# Altium PCB Snowflake.PcbDoc
Units mil, origin at the board's own origin, x right, y up, seen from the top; angles counter-clockwise.
Board outline 2689.25 x 3099.03 mil, 2 copper layers (Top Layer, Bottom Layer), stack 49.606 mil thick; 60 components, 60 nets, 217 pads, 81 vias.
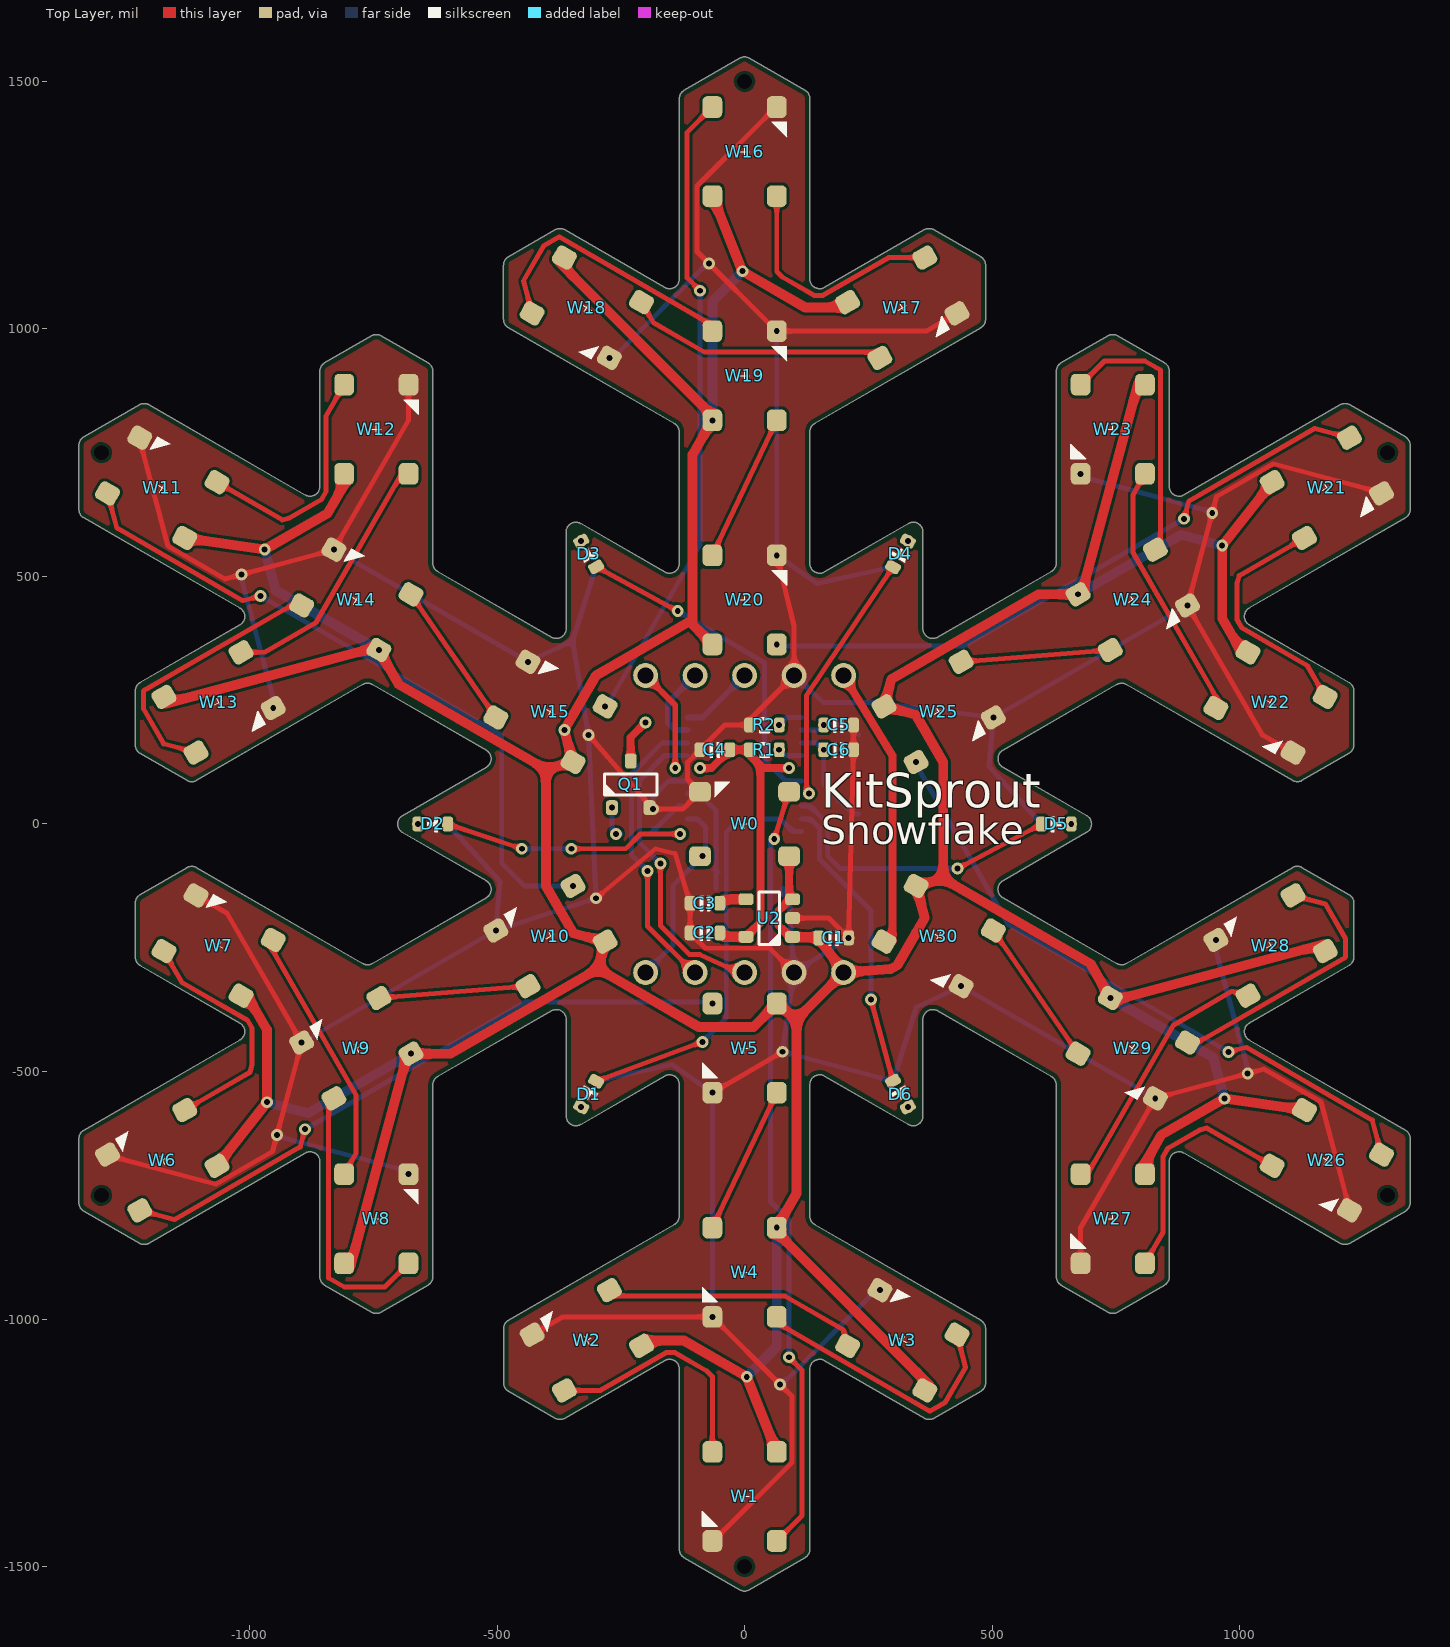
[diagram p0: Top Layer view]
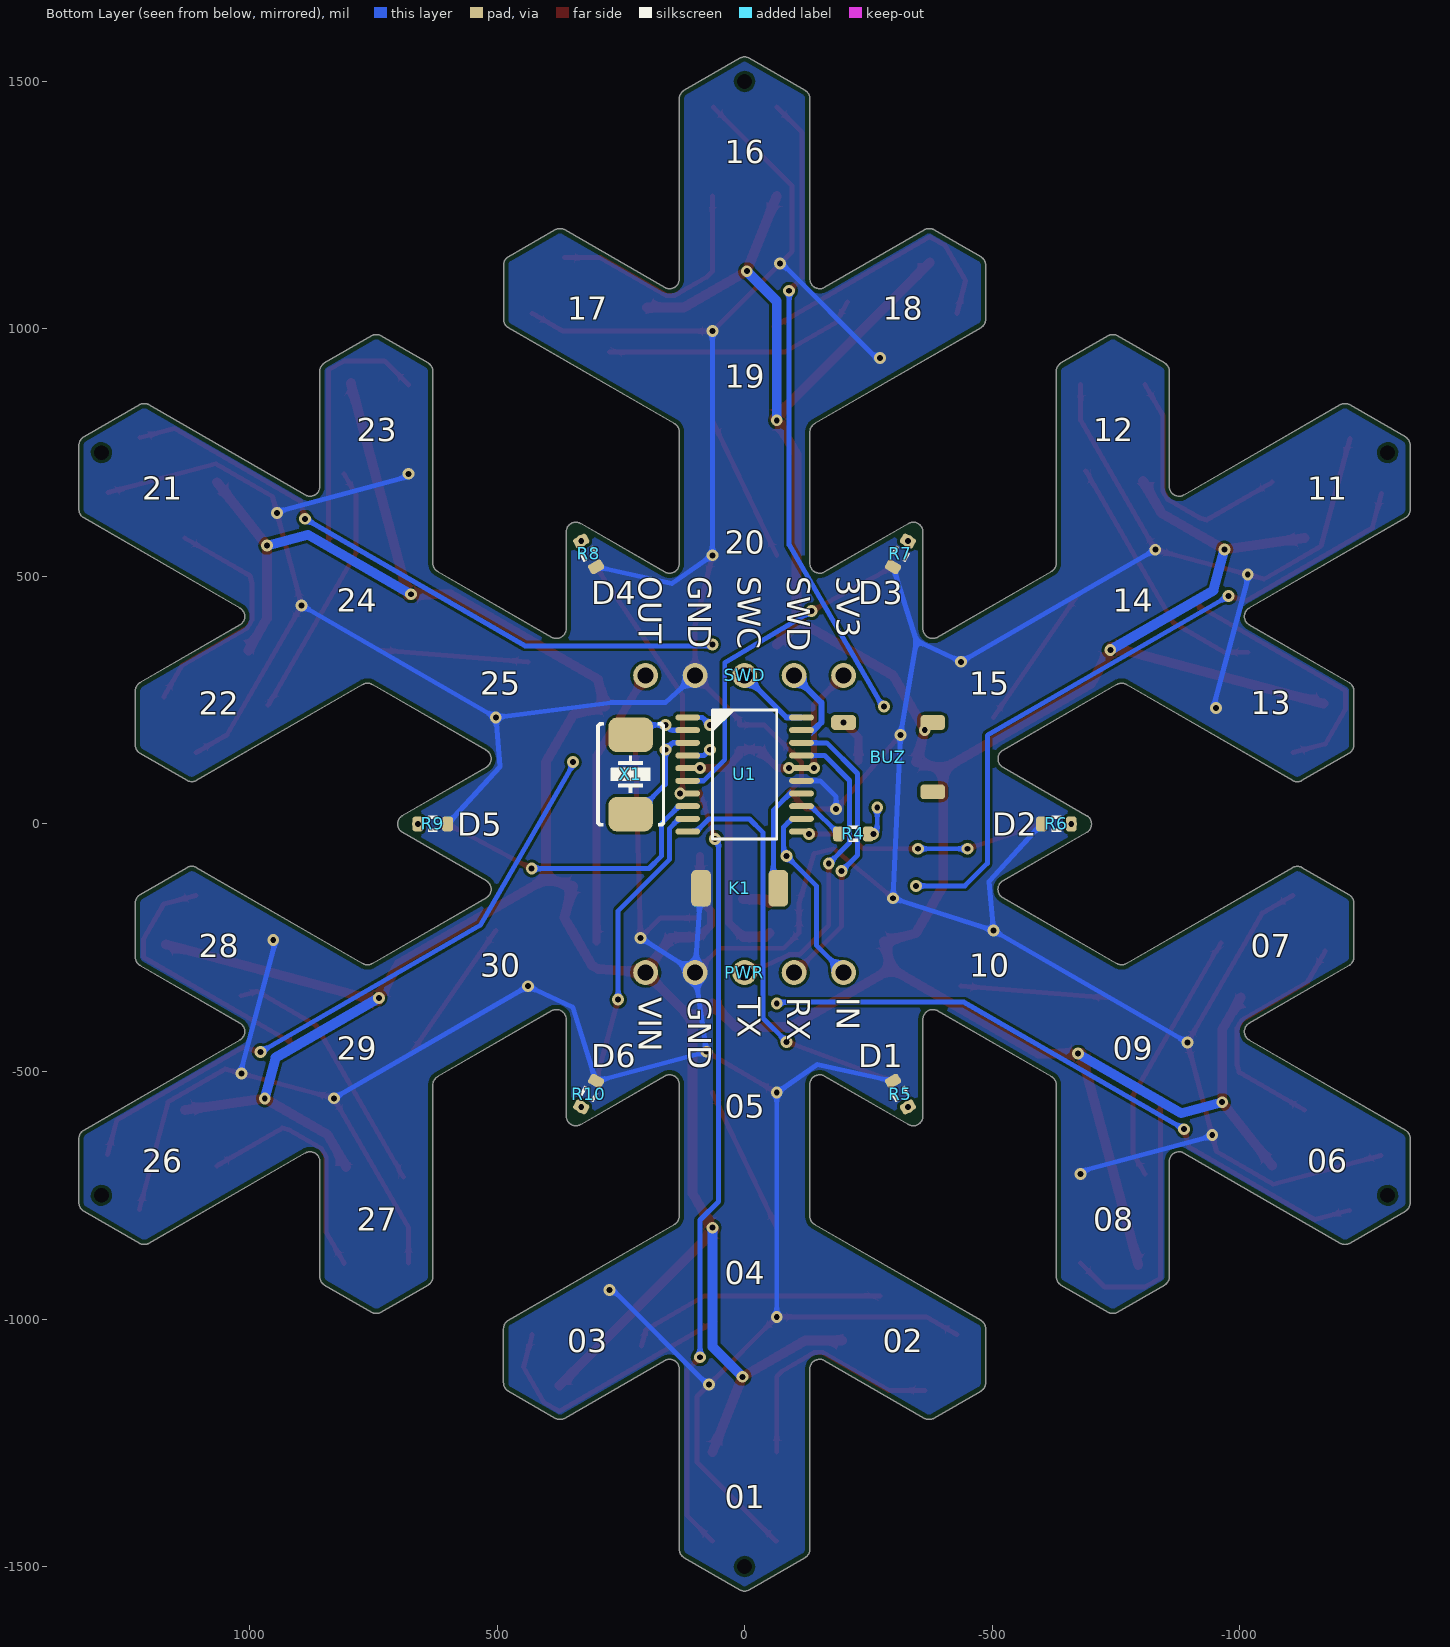
[diagram p1: Bottom Layer view, seen from below]
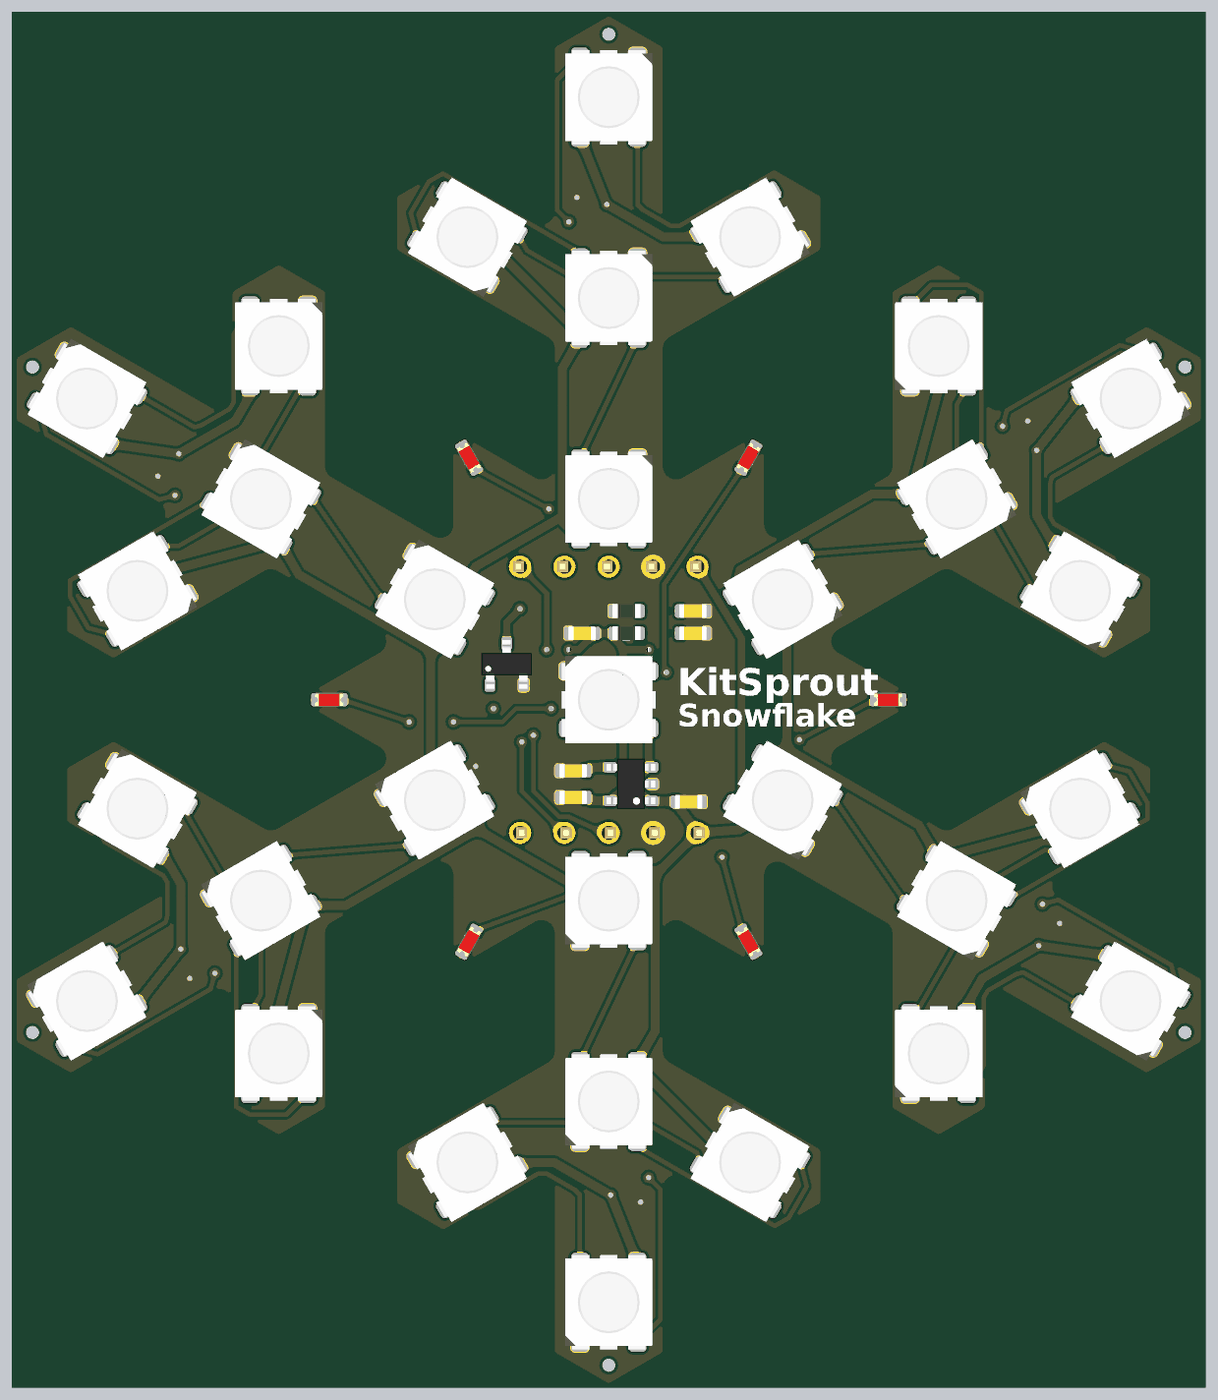
[diagram p2: 3D render of the assembled board from above, using the file's embedded part models]
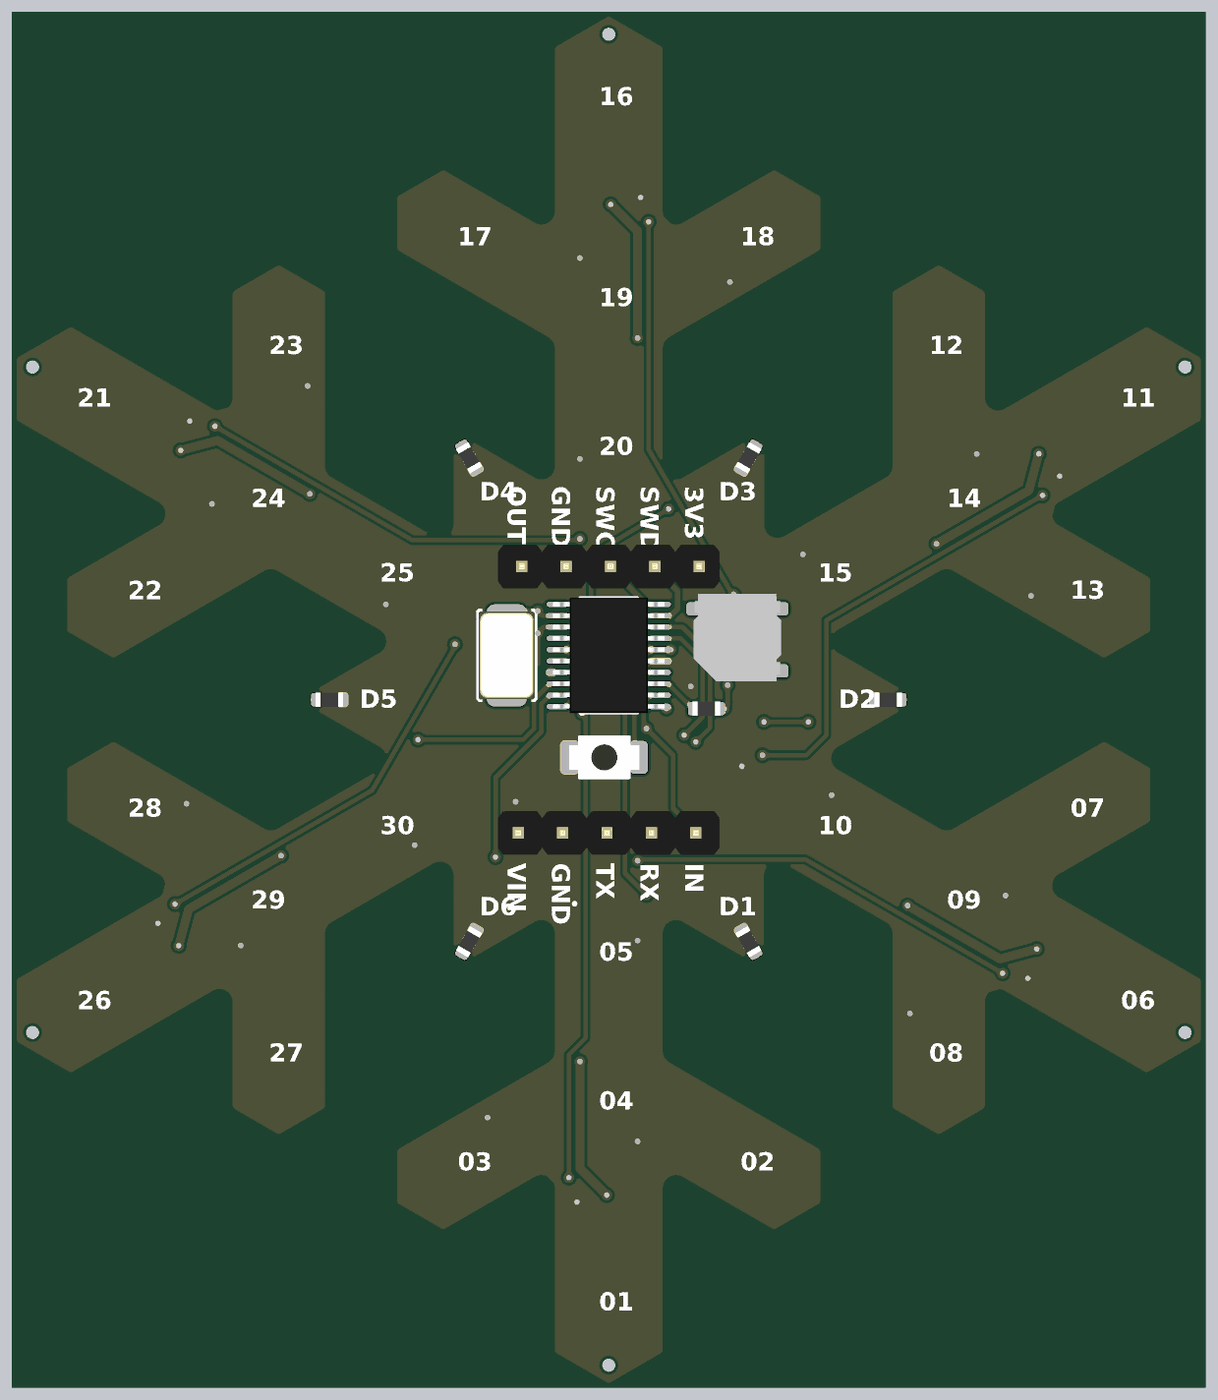
[diagram p3: 3D render of the assembled board from below, using the file's embedded part models]

## Layer stack, top to bottom
Top Solder: solder mask 0.3937, Solder Resist, Dk 3.5
Top Layer: signal copper 1.1811
Dielectric 1: dielectric 47.2441, FR-4, Dk 4.8
Bottom Layer: signal copper 1.1811
Bottom Solder: solder mask 0.3937, Solder Resist, Dk 3.5

## Board outline
341 vertices, not listed, extent -1344.62,-1549.52 1344.63,1549.52

## Design rules (kind name [scope] priority, off if disabled: settings)
BoardOutlineClearance [All] p1: gap=10 ignorepadtopadclearanceinfootprint=FALSE except(0: Arc-SplitContinuation Track-SplitContinuation SMDPad-SplitContinuation THPad-SplitContinuation Via-SplitContinuation Fill-SplitContinuation Poly-SplitContinuation Region-SplitContinuation Text-SplitContinuation)
Clearance ClearancePolygon [InPolygon] p1: gap=6 ignorepadtopadclearanceinfootprint=FALSE except(0: Arc-Hole Track-Hole SMDPad-Hole THPad-Hole Via-Hole Fill-Hole Poly-Hole Region-Hole Text-Hole)
Clearance [All] p2: gap=6 ignorepadtopadclearanceinfootprint=FALSE except(0: Arc-Hole Track-Hole SMDPad-Hole THPad-Hole Via-Hole Fill-Hole Poly-Hole Region-Hole Text-Hole)
ComponentClearance [All] p1: gap=0 collisioncheckmode=3 verticalgap=0 showdistances=FALSE
Height [All] p1: minheight=0 maxheight=5000 prefheight=500
HoleSize [All] p1: absolutevalues=TRUE maxlimit=200 minlimit=1 maxpercent=80.000 minpercent=20.000
HoleToHoleClearance [All] p1: gap=6 allowstackedmicrovias=TRUE
MinimumAnnularRing [All] p1: minimumring=5
MinimumSolderMaskSliver [All] p1: minsoldermaskwidth=0
PolygonConnect [All] p1: connectstyle=Direct reliefconductorwidth=10 reliefentries=4 polygonreliefangle="90 Angle" airgapwidth=10
RoutingVias [All] p1: holewidth=12 width=24 viastyle="Through Hole" minholewidth=12 minwidth=20 maxholewidth=28 maxwidth=50
SilkToSilkClearance [All] p1: silktosilkclearance=0
SilkToSolderMaskClearance [IsPad] p1: minsilkscreentomaskgap=0 clearancetoexposedcopper=TRUE
SolderMaskExpansion [All] p1: expansion=2
Width [All] p1: maxlimit=100 minlimit=6 preferedwidth=10
23 further rules are at their usual default settings.

## Components (designator, comment, footprint, x,y, rotation, side; value= is the part's Value field where it differs from the comment)
BUZ "Buzzer" Buzzer_5x5 -290,140 r90 bottom
C1 "0.1uF" CAP_0603 180,-230 r180 top
C2 "0.1uF" CAP_0603 -80,-220 r0 top
C3 "0.1uF" CAP_0603 -80,-160 r0 top
C4 "0.1uF" CAP_0603 -60,150 r0 top
C5 "0.1uF" CAP_0603 190,200 r180 top
C6 "0.1uF" CAP_0603 190,150 r180 top
D1 "RED" LED_0603_RED -314.96,-545.53 r240 top
D2 "RED" LED_0603_RED -629.92,0 r180 top
D3 "RED" LED_0603_RED -314.96,545.53 r120 top
D4 "RED" LED_0603_RED 314.96,545.53 r60 top
D5 "RED" LED_0603_RED 629.92,0 r0 top
D6 "RED" LED_0603_RED 314.96,-545.53 r300 top
K1 "ButtonTACT" ButtonTACT_3x4x2_180 10,-130 r180 bottom
PWR "HDR1x5_2.54" HDR1X5_2.54_180 200,-300 r90 bottom
Q1 "NPN" SOT23-3 -230,80 r90 top
R1 "10K" RES_0603 40,150 r180 top
R2 "10K" RES_0603 40,200 r0 top
R4 "1K" RES_0603 -220,-20 r180 bottom
R5 "1K" RES_0603 -314.96,-545.53 r240 bottom
R6 "1K" RES_0603 -629.92,0 r180 bottom
R7 "1K" RES_0603 -314.96,545.53 r120 bottom
R8 "1K" RES_0603 314.96,545.53 r60 bottom
R9 "1K" RES_0603 629.92,0 r0 bottom
R10 "1K" RES_0603 314.96,-545.53 r300 bottom
SWD "HDR1x5_2.54" HDR1X5_2.54_180 -200,300 r270 bottom
U1 "STM32F03xF" TSSOP_E170_P0.65_20 0,100 r180 bottom
U2 "RT9193" SOT23-5 50,-190 r180 top
W0 "RGB" LED_5050_WS2812B 0,0 r180 top locked
W1 "RGB" LED_5050_WS2812B 0,-1358.27 r270 top
W2 "RGB" LED_5050_WS2812B -318.64,-1042.87 r210 top
W3 "RGB" LED_5050_WS2812B 318.66,-1042.92 r150 top
W4 "RGB" LED_5050_WS2812B 0,-905.51 r270 top
W5 "RGB" LED_5050_WS2812B 0,-452.76 r270 top locked
W6 "RGB" LED_5050_WS2812B -1176.29,-679.13 r210 top
W7 "RGB" LED_5050_WS2812B -1062.47,-245.49 r150 top
W8 "RGB" LED_5050_WS2812B -743.86,-797.42 r90 top
W9 "RGB" LED_5050_WS2812B -784.2,-452.76 r210 top
W10 "RGB" LED_5050_WS2812B -392.1,-226.38 r210 top
W11 "RGB" LED_5050_WS2812B -1176.29,679.13 r150 top
W12 "RGB" LED_5050_WS2812B -743.83,797.38 r90 top
W13 "RGB" LED_5050_WS2812B -1062.52,245.49 r30 top
W14 "RGB" LED_5050_WS2812B -784.2,452.76 r150 top
W15 "RGB" LED_5050_WS2812B -392.1,226.38 r150 top
W16 "RGB" LED_5050_WS2812B 0,1358.27 r90 top
W17 "RGB" LED_5050_WS2812B 318.64,1042.87 r30 top
W18 "RGB" LED_5050_WS2812B -318.66,1042.92 r330 top
W19 "RGB" LED_5050_WS2812B 0,905.51 r90 top
W20 "RGB" LED_5050_WS2812B 0,452.76 r90 top
W21 "RGB" LED_5050_WS2812B 1176.29,679.13 r30 top
W22 "RGB" LED_5050_WS2812B 1062.47,245.49 r330 top
W23 "RGB" LED_5050_WS2812B 743.86,797.42 r270 top
W24 "RGB" LED_5050_WS2812B 784.2,452.76 r30 top
W25 "RGB" LED_5050_WS2812B 392.1,226.38 r30 top
W26 "RGB" LED_5050_WS2812B 1176.29,-679.13 r330 top
W27 "RGB" LED_5050_WS2812B 743.83,-797.38 r270 top
W28 "RGB" LED_5050_WS2812B 1062.52,-245.49 r210 top
W29 "RGB" LED_5050_WS2812B 784.2,-452.76 r330 top
W30 "RGB" LED_5050_WS2812B 392.1,-226.38 r330 top
X1 "8MHz" XT_5032_2 230,100 r90 bottom

## Footprints (in the part's own frame and the unit in brackets; to place one, negate y for a bottom-side part, rotate by r counter-clockwise, add the part's x,y. Pads: shape width x height; smd on the part's side, far side on the other; paste and mask are expansions set on the pad)
ButtonTACT_3x4x2_180 [mil]
  rrect50% 40x74 smd: 1(-78,0) 2(78,0)
  body extent -79,-49 79,49, height 63
Buzzer_5x5 [mil]
  rrect50% 30x50 smd: N(65,90) NC(-75,-90) P(65,-90)
  body extent -98,-98 98,98, height 106
CAP_0603 [mil]
  rrect50% 22x30 smd: 1(-30,0) 2(30,0)
  silkscreen extent -10,-15 10,15, body extent -31,-16 32,16, height 31
HDR1X5_2.54_180 [mil]
  round 50 hole 32: 1(0,0) 2(0,-100) 3(0,-200) 4(0,-300) 5(0,-400)
  body extent -49,-450 49,50, height 323
LED_0603_RED [mil]
  rrect50% 22x30 smd: 1(-30,0) 2(30,0)
  silkscreen extent -10,-16 10,16, body extent -32,-16 32,16, height 24
LED_5050_WS2812B [mil]
  rrect50% 44x40 smd: 1(-90,65) 2(-90,-65) 3(90,-65) 4(90,65)
  silkscreen extent 30,-85 60,-55, body extent -106,-98 106,98, height 69
RES_0603 [mil]
  rrect50% 22x30 smd: 1(-30,0) 2(30,0)
  silkscreen extent -10,-15 10,16, body extent -31,-16 31,16, height 18
SOT23-3 [mil]
  rrect50% 30x24 smd: 1(-47,38) 2(-47,-38) 3(47,0)
  silkscreen extent -21,-53 21,53, body extent -55,-57 55,57, height 51
SOT23-5 [mil]
  rrect50% 30x24 smd: 1(-47,38) 2(-47,0) 3(-47,-38) 4(47,-38) 5(47,38)
  silkscreen extent -21,-53 21,53, body extent -55,-57 55,57, height 57
TSSOP_E170_P0.65_20 [mil]
  oval 50x12 smd: 1(-115,115.16) 2(-115,89.57) 3(-115,63.98) 4(-115,38.39) 5(-115,12.8) 6(-115,-12.8) 7(-115,-38.39) 8(-115,-63.98) 9(-115,-89.57) 10(-115,-115.16) 11(115,-115.16) 12(115,-89.57) 13(115,-63.98) 14(115,-38.39) 15(115,-12.8) 16(115,12.8) 17(115,38.39) 18(115,63.98) 19(115,89.57) 20(115,115.16)
  silkscreen extent -65,-130 65,130, body extent -126,-130 126,130, height 42
XT_5032_2 [mil]
  rrect50% 70x90 smd: 1(-80,0) 2(80,0)
  silkscreen extent -105,-68 105,68, body extent -98,-63 98,63, height 39

## Part data
C1 C2 C3 C4 C5 C6: library part Cap_0603, "Capacitor", Type=0603
D1 D2 D3 D4 D5 D6: library part LED_0603, "LED", Type=0603
K1: library part ButtonTACT_3x4x2_180, "Button"
PWR SWD: "Header"
Q1: library part BJT_NPN, "Transistor", Type=2N2222
R1 R2 R4 R5 R6 R7 R8 R9 R10: library part Res_0603, "Resistor", Type=0603
U1: "MCU"
U2: "Power", Type=SOT23-5
W0 W1 W2 W3 W4 W5 W6 W7 W8 W9 W10 W11 W12 W13 W14 W15 W16 W17 W18 W19 W20 W21 W22 W23 W24 W25 W26 W27 W28 W29 W30: library part LED_5050_WS2812B, "LED", Type=5050
X1: library part XTAL_5032_2P, "Crystal Oscillator", Type=XTAL5032

## Free pads (board coordinates)
  round 20 hole 30 unplated: 0(-1299.04,-750) 0(-1299.04,750) 0(0,-1500) 0(0,1500) 0(1299.04,-750) 0(1299.04,750)

## Via types
v1: diameter 24, hole 12, Top Layer to Bottom Layer, tented both sides, 81 vias

## Nets (pads, with @x,y where several pads share a name; then routed paths per layer and width w, separated by ;. In a path a pad name is that pad's centre, name@x,y a point inside that pad or via, vN(x,y) a via of type N, cw(c..) or ccw(c..) an arc to the next point about the centre after c; other vN are vias at no path point)
+3V3: C2.2 C4.2 R1.2 SWD.1 U1.5 U1.16 U2.5 | length 843.1
  Top Layer w12: SWD.1 -140,240 v1(-140,112.8)
  Top Layer w16: v1(-90,112.8) -67.2,112.8 C4.2 R1.2 10,140 32,118 ; U2.5 32,-199 32,118 ; v1(90,112.8) 37.2,112.8 32,118
  Top Layer w20: C2.2 -42,-228 U2.5
+VIN: BUZ.P C1.2 PWR.1 U2.1 U2.3 W0.1 W1.1 W2.1 W3.1 W4.1 W5.1 W6.1 W7.1 W8.1 W9.1 W10.1 W11.1 W12.1 W13.1 W14.1 W15.1 W16.1 W17.1 W18.1 W19.1 W20.1 W21.1 W22.1 W23.1 W24.1 W25.1 W26.1 W27.1 W28.1 W29.1 W30.1 | length 12225.6
  Top Layer w16: W0.1 90,-145 U2.3 91.72,-152 68,-175.72 68,-204.28 91.72,-228 U2.1
  Top Layer w20: W13.1@-1169.37,243.17 -1169.32,243.18 -1168.34,243.44 W14.1@-740.58,358.06 ; W11.1 v1(-969.3,554.47) -842.12,627.89 ; W6.1@-1065.85,-690.21 v1(-964.83,-561.98) -964.83,-415.13 ; W7.1@-1002.2,-350.53 -965,-414.97 ; -842.06,628.12 W12.1@-804.86,692.56 ; W8.1@-795.2,-891.08 W8.1@-795.15,-890.88 ; W8.1@-795.15,-890.88 W9.1@-680.31,-462.29 ; v1(-738.78,351.42) -698.82,282.22 -401.3,110.45 ; W9.1@-673.73,-464.09 -593.82,-464.09 -296.3,-292.31 ; W18.1@-374.1,1134.21 W19.1@-60.2,820.31 ; W2.1@-197.34,-1043.31 -122.94,-1043.31 ; -122.71,-1043.25 v1(4.47,-1116.67) W1.1 ; -105,412.76 -300.18,300.07 v1(-363.95,189.62) W15.1 -401.3,110.45 ; v1(-65.05,815.51) -105,746.31 -105,409.87 -105,402.76 W20.1 ; W16.1 v1(-4.47,1116.67) 122.71,1043.25 ; W4.1@60.2,-820.31 W3.1@374.1,-1134.21 ; v1(65.05,-815.51) 105,-746.31 105,-395 ; U2.1 C1.2 PWR.1 ; 122.94,1043.31 W17.1@197.34,1043.31 ; v1(673.73,464.09) 593.82,464.09 296.3,292.31 W25.1 346.19,220.38 401.3,124.93 401.3,-110.45 ; W24.1@680.29,462.33 W23.1@795.17,891.09 ; v1(738.78,-351.42) 698.82,-282.22 401.3,-110.45 ; W29.1@740.54,-358.01 W28.1@1169.3,-243.13 ; W27.1@804.86,-692.56 842.06,-628.12 842.12,-627.89 v1(969.3,-554.47) W26.1 ; 964.83,415.35 v1(964.83,562.2) W21.1 ; 965,415.18 W22.1@1002.2,350.75 ; -401.3,110.45 -401.3,-124.93 -346.19,-220.38 W10.1 -296.3,-292.31 ; -296.3,-292.31 -92.45,-410 17.76,-410 W5.1 105,-395 ; 105,-395 PWR.1 ; PWR.1 294.93,-293.1 308.84,-285.07 346.66,-219.57 363.95,-189.62 W30.1 401.3,-110.45
  Bottom Layer w20: v1(-969.3,554.47) -947.13,471.71 v1(-738.78,351.42) ; v1(-964.83,-561.98) -882.08,-584.16 v1(-673.73,-463.87) ; v1(-65.05,815.51) -65.05,1056.09 v1(-4.47,1116.67) ; v1(4.47,-1116.67) 65.05,-1056.09 v1(65.05,-815.51) ; v1(673.73,464.09) 882.08,584.38 v1(964.83,562.2) ; v1(738.78,-351.42) 947.13,-471.72 v1(969.3,-554.47)
BUZZ: R4.1 U1.13 | length 98.2
  Bottom Layer w10: R4.1 -133.98,36.02 U1.13
GND: C1.1 C2.1 C3.1 C4.1 C5.1 C6.1 K1.1 PWR.2 Q1.2 R2.1 R5.1 R6.1 R7.1 R8.1 R9.1 R10.1 SWD.4 U1.15 U2.2 W0.3 W1.3 W2.3 W3.3 W4.3 W5.3 W6.3 W7.3 W8.3 W9.3 W10.3 W11.3 W12.3 W13.3 W14.3 W15.3 W16.3 W17.3 W18.3 W19.3 W20.3 W21.3 W22.3 W23.3 W24.3 W25.3 W26.3 W27.3 W28.3 W29.3 W30.3 | length 15846.1
  Top Layer w10: W6.3@-1285.71,-669.44 -1068.1,-727.75 -953.39,-661.52 -944.42,-628.04 W9.3@-894.46,-441.59 ; W11.3@-1222.68,778.77 -1164.37,561.17 -1049.66,494.94 -1016.33,503.87 W14.3@-829.73,553.87 ; W7.3 -1045.6,-180.17 W9.3@-894.79,-441.37 ; W14.3@-829.64,554.23 -678.83,815.43 W12.3 ; W8.3@-678.47,-709.26 -678.04,-707.64 W8.3@-677.99,-707.44 ; W2.3 -366.77,-995.6 W4.3@-65.16,-995.6 ; v1(-315,180) -189.49,35.18 v1(-185,30) -125,30 W0.3 -115,90 -115,125 C4.1 -40,200 R2.1 10,210 SWD.4 100,400 v1(65,542.76) ; v1(-300,-150) -180,-50 -140,-60 C3.1 C2.1 -79,-251 51,-251 PWR.2 ; W1.3 -63.3,-1448.27 96,-1288.97 96,-1156.51 v1(71.69,-1132.2) v1(-65,-995.51) ; v1(-65,-542.76) v1(77,-460) ; W16.3@63.1,1448.18 -96.2,1288.88 -96.2,1156.42 W19.3@64.8,995.42 ; W19.3@65.16,995.6 366.77,995.6 W17.3 ; U2.2 170,-190 v1(210,-230) C6.1 C5.1 ; W27.3@678.83,-887.2 678.83,-815.25 v1(829.64,-554.05) v1(1016.36,-504.02) 1049.57,-495.12 1164.28,-561.34 W26.3@1222.59,-778.95 ; v1(894.64,441.46) 944.64,628.2 953.55,661.43 1068.25,727.66 W21.3@1285.86,669.35 ; W24.3@894.79,441.37 1045.6,180.17 W22.3
  Bottom Layer w10: v1@-1017.71,499.99 v1@-948.26,240.82 ; v1@-941.86,-631.14 v1@-682.68,-700.59 ; v1(-894.64,-441.46) v1(-502.54,-215.09) ; v1(-829.64,554.05) v1(-437.54,327.67) -347.33,370 ; R6.1 -494.09,-115.8 v1(-502.54,-215.09) ; R5.1 -146.76,-485.8 v1(-65,-542.76) v1(-65,-995.51) ; R7.1 -347.33,370 ; v1@-265.58,941.63 v1@-75.85,1131.36 ; v1(-185,30) -185,55 -152.8,87.2 U1.15 ; v1(65,995.51) v1(65,542.76) 146.76,485.8 R8.1 ; v1@75.85,-1131.36 v1@265.58,-941.63 ; K1.1@78,-142 K1.1@78,-130 ; K1.1 PWR.2 ; SWD.4 160,245 270,245 v1(502.54,215.09) ; v1(210,-230) PWR.2 ; R9.1 494.09,115.8 v1(502.54,215.09) ; v1@682.68,700.81 v1@941.86,631.36 ; v1(829.64,-554.05) v1(437.54,-327.67) 347.33,-370 R10.1 v1(77,-460) PWR.2 ; v1(894.64,441.46) v1(502.54,215.09) ; v1@948.26,-240.82 v1@1017.71,-500 ; v1(-502.54,-215.09) v1(-300,-150) v1(-315,180) -347.33,370
  other v1: 273.22,-941.63 -678.86,-707.2 -944.67,-627.97 952.08,-234.2 -952.08,234.2 -1016.36,504.02 944.67,628.19 678.86,707.42 -273.22,941.63 -71.69,1132.2
KEY: K1.2 U1.14 | length 228.9
  Bottom Layer w10: U1.14 -91.61,61.61 -58,28 K1.2@-58,-130
LED1: D1.1 U1.10 | length 845.7
  Top Layer w10: D1.1 v1(-85,-440)
  Bottom Layer w10: v1(-85,-440) -37,-392 -37,-17 -10,10 72.39,10 97.55,-15.16 U1.10
LED2: D2.1 U1.11 | length 490.4
  Top Layer w10: D2.1 v1(-450,-50) ; v1(-350,-50) -240,-50 -210.16,-20.16 v1(-130,-20.16)
  Bottom Layer w10: v1(-450,-50) v1(-350,-50)
LED3: D3.1 U1.6 | length 680
  Top Layer w10: D3.1 v1(-135,430)
  Bottom Layer w10: v1(-135,430) 40,325.95 40,130 82.8,87.2 U1.6
LED4: D4.1 U1.7 | length 513.5
  Top Layer w10: v1(130,61.61) 125,66.61 125,260 D4.1
LED5: D5.1 U1.8 | length 597.8
  Top Layer w10: v1(430,-90) D5.1
  Bottom Layer w10: U1.8 132.45,36.02 168,0.47 168,-65 193,-90 v1(430,-90)
LED6: D6.1 U1.9 | length 604.3
  Top Layer w10: v1(255.39,-354.9) D6.1
  Bottom Layer w10: U1.9 132.45,10.43 151.5,-8.61 151.5,-71.5 255.39,-175.39 v1(255.39,-354.9)
LINE: PWR.5 U1.12 W0.4 | length 386.9
  Bottom Layer w10: PWR.5 -145,-245 -145,-125 v1(-85,-65) -79,-59 -79,-6 -95.43,10.43 U1.12
LINE_OUT: SWD.5 W30.2 | length 565.6
  Top Layer w16: SWD.5 299.02,138.17 W30.2@299.02,-237.67
NetBUZ_N: BUZ.N Q1.3 | length 90.4
  Top Layer w16: Q1.3 -230,175 v1(-200,205)
NetC3_2: C3.2 U2.4 | length 56.3
  Top Layer w20: C3.2 -42,-152 U2.4
NetC5_2: C5.2 U1.2 X1.2 | length 127.6
  Bottom Layer w10: U1.2 149.57,189.57 v1(160,200) 210,200 X1.2
NetC6_2: C6.2 U1.3 X1.1 | length 215.6
  Bottom Layer w10: U1.3 146.02,163.98 v1(160,150) 160,80 220,20 X1.1
NetD1_2: D1.2 R5.2
  other v1: -329.96,-571.51
NetD2_2: D2.2 R6.2
  other v1: -659.92,0
NetD3_2: D3.2 R7.2
  other v1: -329.96,571.51
NetD4_2: D4.2 R8.2
  other v1: 329.96,571.51
NetD5_2: D5.2 R9.2
  other v1: 659.92,0
NetD6_2: D6.2 R10.2
  other v1: 329.96,-571.51
NetQ1_1: Q1.1 R4.2 | length 66.3
  Bottom Layer w10: v1(-268,33) -268,-12 v1(-260,-20) R4.2
NetR1_1: R1.1 U1.4 | length 49.8
  Bottom Layer w10: v1(70,150) 81.61,138.39 U1.4
NetR2_2: R2.2 U1.1 | length 51.3
  Bottom Layer w10: v1(70,200) 85.16,215.16 U1.1
NetW0_2: W0.2 W1.4 | length 1564.1
  Top Layer w10: v1(60,-30) W0.2 ; W1.4 116,-1397.27 116,-1103.2 v1(90,-1077.2)
  Bottom Layer w10: v1@52.5,-31.2 52.5,-762.5 90,-800 v1(90,-1077.2)
NetW1_2: W1.2 W2.4 | length 486.3
  Top Layer w10: W2.4 -290.87,-1144.16 -158.66,-1067.83 -140.46,-1067.83 -76.13,-1104.97 -65,-1116.1 W1.2
NetW2_2: W2.2 W3.4 | length 524.5
  Top Layer w10: W2.2@-273.2,-953.43 81.39,-953.43 199.29,-1021.5 W3.4@208.02,-1054.1
NetW3_2: W3.2 W4.4 | length 549.1
  Top Layer w10: W4.4@59.77,-1004.57 374.19,-1186.1 405.72,-1167.89 446.52,-1097.23 428.95,-1031.67 W3.2@428.91,-1031.52
NetW4_2: W4.2 W5.4 | length 302.2
  Top Layer w10: W4.2 W5.4
NetW5_2: W5.2 W6.4 | length 1295.8
  Top Layer w10: W6.4 -1152.07,-799.09 -897.4,-652.06 v1(-887.89,-616.55)
  Bottom Layer w10: v1(-887.89,-616.55) -443.4,-359.92 -67.83,-359.92 v1(-65,-362.76)
NetW6_2: W6.2 W7.4 | length 486.3
  Top Layer w10: W7.4 -1136.31,-320.18 -1004.1,-396.51 -995,-412.28 -995,-486.56 -999.07,-501.76 W6.2
NetW7_2: W7.2 W8.4 | length 521.2
  Top Layer w10: W7.2@-962.3,-240.12 -785,-547.2 -785,-665.73 -808.93,-707.17 W8.4@-809.02,-707.33
NetW8_2: W8.2 W9.4 | length 549.1
  Top Layer w10: W9.4@-840.1,-554.05 -840.1,-917.11 -808.56,-935.31 -726.97,-935.31 W8.2@-678.86,-887.2
NetW9_2: W9.2 W10.4 | length 302.1
  Top Layer w10: W9.2@-738.75,-351.46 W10.4
NetW10_2: W10.2 W11.4 | length 1391.3
  Top Layer w10: W11.4 -1268.07,598.17 -1013.4,451.14 v1(-977.89,460.66)
  Bottom Layer w10: v1(-977.89,460.66) -490.44,179.23 -490.44,-79.56 -444.91,-125.09 v1(-346.66,-125.09) v1@-345.62,-121.22
NetW11_2: W11.2 W12.4 | length 486.3
  Top Layer w10: W11.2 -934.07,614.34 -918.87,618.42 -854.54,655.56 -845.44,671.32 -845.44,823.98 W12.4
NetW12_2: W12.2 W13.4 | length 521.2
  Top Layer w10: W13.4@-1017.08,346.97 -969.04,346.97 -866.39,406.23 W12.2@-689.1,713.31
NetW13_2: W13.2 W14.4 | length 549.1
  Top Layer w10: W13.2@-1107.77,144.31 -1107.92,144.35 -1173.49,161.92 -1214.29,232.58 -1214.29,268.99 W14.4@-899.9,450.5
NetW14_2: W14.2 W15.4 | length 302.2
  Top Layer w10: W14.2 -673.78,464.03 W15.4
NetW15_2: W15.2 W16.4 | length 1295.8
  Top Layer w10: v1(-90,1077.21) -116,1103.21 -116,1397.27 W16.4
  Bottom Layer w10: v1(-281.66,237.67) -277.79,238.71 -90,563.96 v1(-90,1077.21)
NetW16_2: W16.2 W17.4 | length 486.3
  Top Layer w10: W16.2 65,1116.1 76.13,1104.98 140.46,1067.84 158.66,1067.83 290.86,1144.16 W17.4
NetW17_2: W17.2 W18.4 | length 521.2
  Top Layer w10: W18.4@-208.06,1054.3 -184.04,1012.69 -81.39,953.43 W17.2@273.2,953.43
NetW18_2: W18.2 W19.4 | length 549.1
  Top Layer w10: W18.2@-428.91,1031.52 -428.95,1031.67 -446.52,1097.23 -405.72,1167.89 -374.19,1186.1 W19.4@-59.77,1004.57
NetW19_2: W19.2 W20.4 | length 302.2
  Top Layer w10: W20.4 W19.2
NetW20_2: W20.2 W21.4 | length 1295.8
  Top Layer w10: v1(887.89,616.55) 897.4,652.06 1152.07,799.09 W21.4
  Bottom Layer w10: v1(65,362.76) 67.83,359.92 443.4,359.92 v1(887.89,616.55)
NetW21_2: W21.2 W22.4 | length 486.3
  Top Layer w10: W21.2 999.07,501.76 995,486.56 995,412.28 1004.1,396.51 1136.31,320.18 W22.4
NetW22_2: W22.2 W23.4 | length 521.2
  Top Layer w10: W23.4@809.02,707.33 785,665.73 785,547.21 W22.2@962.3,240.12
NetW23_2: W23.2 W24.4 | length 549.1
  Top Layer w10: W23.2@678.86,887.21 678.97,887.31 726.97,935.31 808.56,935.31 840.1,917.11 W24.4@840.1,554.05
NetW24_2: W24.2 W25.4 | length 302.1
  Top Layer w10: W25.4 W24.2@738.73,351.5
NetW25_2: W25.2 W26.4 | length 1295.8
  Top Layer w10: v1(977.89,-460.66) 1013.4,-451.14 1268.07,-598.17 W26.4
  Bottom Layer w10: v1(346.66,125.09) 345.62,121.22 533.41,-204.04 v1(977.89,-460.66)
NetW26_2: W26.2 W27.4 | length 486.4
  Top Layer w10: W26.2 934.07,-614.34 918.87,-618.42 854.54,-655.56 845.44,-671.32 845.44,-823.98 W27.4@808.91,-887.25 ; W27.4@808.91,-887.25 W27.4 W27.4@808.91,-887.25
NetW27_2: W27.2 W28.4 | length 524.5
  Top Layer w10: W27.2@689.1,-713.31 866.39,-406.23 984.29,-338.16 W28.4@1016.89,-346.9
NetW28_2: W28.2 W29.4 | length 549.1
  Top Layer w10: W29.4@899.87,-450.34 1214.29,-268.81 1214.29,-232.4 1173.49,-161.74 W28.2 W28.2@1107.77,-144.13
NetW29_2: W29.2 W30.4 | length 302.2
  Top Layer w10: W30.4 W29.2
RX: PWR.4 U1.18 | length 589.5
  Top Layer w10: v1(-196.07,-95) -196.07,-206.66 PWR.4@-110,-292.73 ; PWR.4 PWR.4@-100,-292.73
  Bottom Layer w10: v1(-196.07,-95) -228,-63.07 -228,102 -166.02,163.98 U1.18
SWCLK: SWD.3 U1.20 | length 150.1
  Bottom Layer w12: U1.20 -84.84,215.16 SWD.3
SWDIO: SWD.2 U1.19 | length 164.2
  Bottom Layer w12: U1.19 -139.57,189.57 -155,205 -155,245 SWD.2
TX: PWR.3 U1.17 | length 629.5
  Top Layer w10: v1(-170,-80) -170,-205 -111,-264 -90,-264 PWR.3@-1.94,-304.25
  Bottom Layer w10: v1(-170,-80) -212,-38 -212,88 -161.61,138.39 U1.17
pads on no net: BUZ.NC

## Polygon pours and split planes (outlines as drawn)
GND on Top Layer "GND_L01_P001" (solid, remove dead copper, pour order 1): 341 vertices, not listed, extent -1344.62,-1549.52 1344.63,1549.52
GND on Bottom Layer "GND_L02_P000" (solid, remove dead copper, pour order 0): 341 vertices, not listed, extent -1344.62,-1549.52 1344.63,1549.52

## Silkscreen, mask and mechanical layers (free items; w line width, h text height)
Top Overlay:
  lines w2: -1184.82,-684.06 -1167.77,-674.21 ; -1184.82,684.06 -1167.77,674.21 ; -1181.22,-670.61 -1171.37,-687.66 ; -1181.22,670.61 -1171.37,687.66 ; -1071.05,240.57 -1054,250.41 ; -1071,-240.56 -1053.95,-250.41 ; -1067.44,254.02 -1057.6,236.97 ; -1067.39,-254.01 -1057.55,-236.96 ; -792.72,-457.68 -775.67,-447.83 ; -792.72,457.68 -775.67,447.83 ; -789.12,-444.23 -779.28,-461.28 ; -789.12,444.23 -779.28,461.28 ; -753.71,-797.42 -734.02,-797.42 ; -753.68,797.38 -733.99,797.38 ; -743.86,-807.27 -743.86,-787.58 ; -743.83,787.54 -743.83,807.23 ; -400.62,-231.3 -383.57,-221.46 ; -400.62,231.3 -383.57,221.46 ; -397.02,-217.85 -387.18,-234.9 ; -397.02,217.85 -387.18,234.9 ; -327.18,1047.84 -310.13,1038 ; -327.16,-1047.79 -310.12,-1037.95 ; -323.56,-1034.35 -313.72,-1051.39 ; -323.58,1034.39 -313.74,1051.44 ; -9.84,-1358.27 9.84,-1358.27 ; -9.84,-905.51 9.84,-905.51 ; -9.84,-452.76 9.84,-452.76 ; -9.84,0 9.84,0 ; -9.84,452.76 9.84,452.76 ; -9.84,905.51 9.84,905.51 ; -9.84,1358.27 9.84,1358.27 ; 0,-1368.11 0,-1348.43 ; 0,-915.35 0,-895.67 ; 0,-462.6 0,-442.91 ; 0,-9.84 0,9.84 ; 0,442.91 0,462.6 ; 0,895.67 0,915.35 ; 0,1348.43 0,1368.11 ; 310.12,1037.95 327.16,1047.79 ; 310.13,-1038 327.18,-1047.84 ; 313.72,1051.39 323.56,1034.35 ; 313.74,-1051.44 323.58,-1034.39 ; 383.57,-221.46 400.62,-231.3 ; 383.57,221.46 400.62,231.3 ; 387.18,-234.9 397.02,-217.85 ; 387.18,234.9 397.02,217.85 ; 733.99,-797.38 753.68,-797.38 ; 734.02,797.42 753.71,797.42 ; 743.83,-807.23 743.83,-787.54 ; 743.86,787.58 743.86,807.27 ; 775.67,-447.83 792.72,-457.68 ; 775.67,447.84 792.72,457.68 ; 779.27,-461.28 789.12,-444.23 ; 779.28,461.28 789.12,444.23 ; 1053.95,250.41 1071,240.56 ; 1054,-250.41 1071.05,-240.57 ; 1057.55,236.96 1067.39,254.01 ; 1057.6,-236.97 1067.44,-254.02 ; 1167.77,674.21 1184.82,684.06 ; 1167.77,-674.21 1184.82,-684.06 ; 1171.37,-687.66 1181.22,-670.61 ; 1171.37,687.66 1181.22,670.61
  text "KitSprout" at 155,10 h120
  text "Snowflake" at 155,-60 h100
Bottom Overlay:
  text "16" at 40,1318.27 h80
  text "18" at -278.66,1002.92 h80
  text "17" at 358.64,1002.87 h80
  text "19" at 40,865.51 h80
  text "12" at -703.83,757.38 h80
  text "23" at 783.86,757.42 h80
  text "11" at -1136.29,639.13 h80
  text "21" at 1216.29,639.13 h80
  text "20" at 40,530 h80
  text "3V3" at -170,500 h80 r90
  text "SWD" at -70,500 h80 r90
  text "SWC" at 30,500 h80 r90
  text "GND" at 130,500 h80 r90
  text "OUT" at 230,500 h80 r90
  text "D3" at -230,427.65 h80
  text "D4" at 310,427.65 h80
  text "14" at -744.2,412.76 h80
  text "24" at 824.2,412.76 h80
  text "15" at -453.63,245 h80
  text "25" at 533.63,245 h80
  text "13" at -1022.52,205.49 h80
  text "22" at 1102.19,205 h80
  text "D2" at -500,-40 h80
  text "D5" at 580,-40 h80
  text "07" at -1022.47,-285.49 h80
  text "28" at 1102.52,-285.49 h80
  text "10" at -453.63,-325 h80
  text "30" at 533.63,-325 h80
  text "IN" at -170,-350 h80 r90
  text "RX" at -70,-350 h80 r90
  text "TX" at 30,-350 h80 r90
  text "GND" at 130,-350 h80 r90
  text "VIN" at 230,-350 h80 r90
  text "09" at -744.2,-492.76 h80
  text "29" at 824.2,-492.76 h80
  text "D1" at -230,-507.65 h80
  text "D6" at 310,-507.65 h80
  text "05" at 40,-610 h80
  text "06" at -1136.29,-719.13 h80
  text "26" at 1216.29,-719.13 h80
  text "08" at -703.86,-837.42 h80
  text "27" at 783.83,-837.38 h80
  text "04" at 40,-945.51 h80
  text "02" at -278.64,-1082.87 h80
  text "03" at 358.66,-1082.92 h80
  text "01" at 40,-1398.27 h80
Mechanical 1:
  drawing of 192 lines, arcs and shapes, not listed
Mechanical 13:
  lines w2: -1345,-1550 -1345,1550 1345,1550 1345,-1550 -1345,-1550
Drill Drawing:
  text ".Legend" at 1550,-1450 h60

## Dimensions
1345,1550 to 1345,-1550 on Mechanical 13
-1345,1550 to 1345,1550 on Mechanical 13